# Altium PCB PCB_Sword.PcbDoc
Units mm, origin at the board's own origin, x right, y up, seen from the top; angles counter-clockwise.
Board outline 100 x 19 mm, 4 copper layers (Top Layer, Int1 (GND), Int2 (PWR), Bottom Layer), stack 1.333 mm thick; 110 components, 77 nets, 444 pads, 119 vias.
Unrouted connection lines stored in the file: 3.
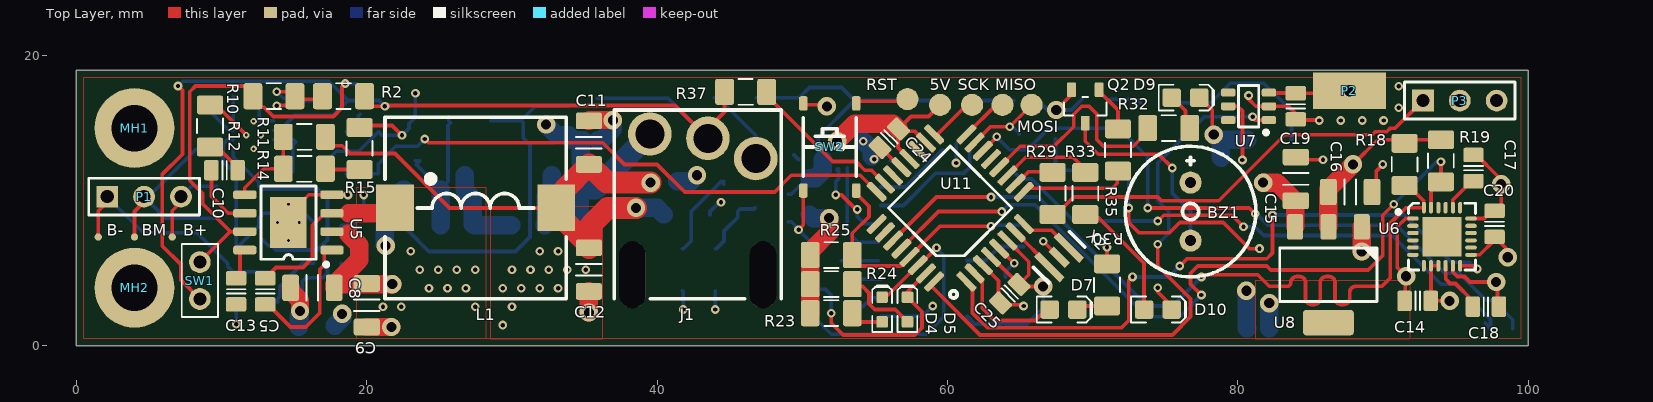
[diagram p0: Top Layer view]
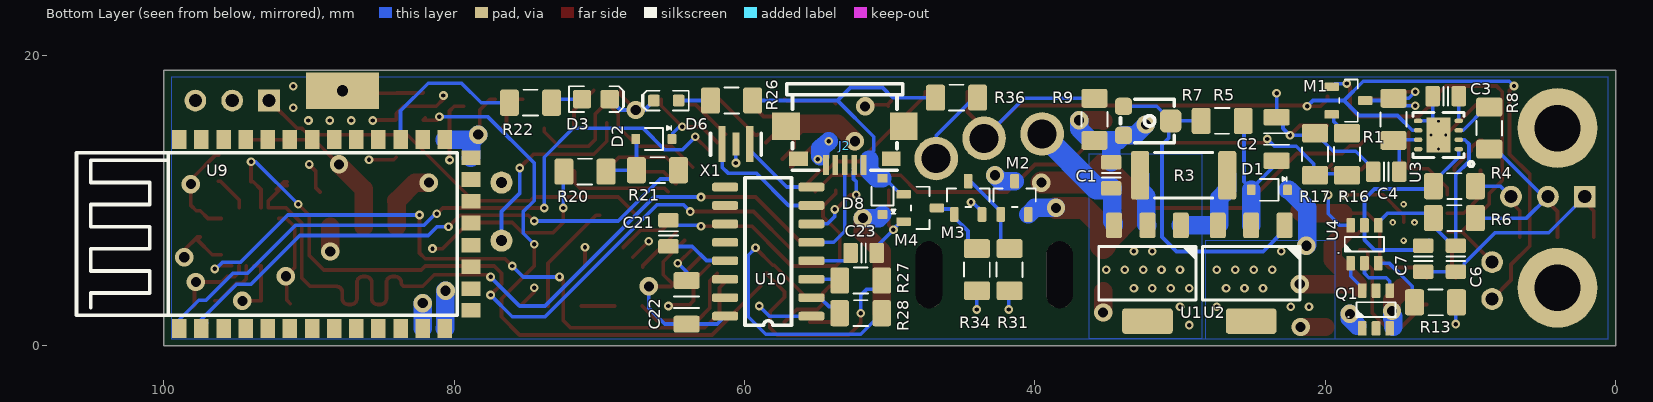
[diagram p1: Bottom Layer view, seen from below]
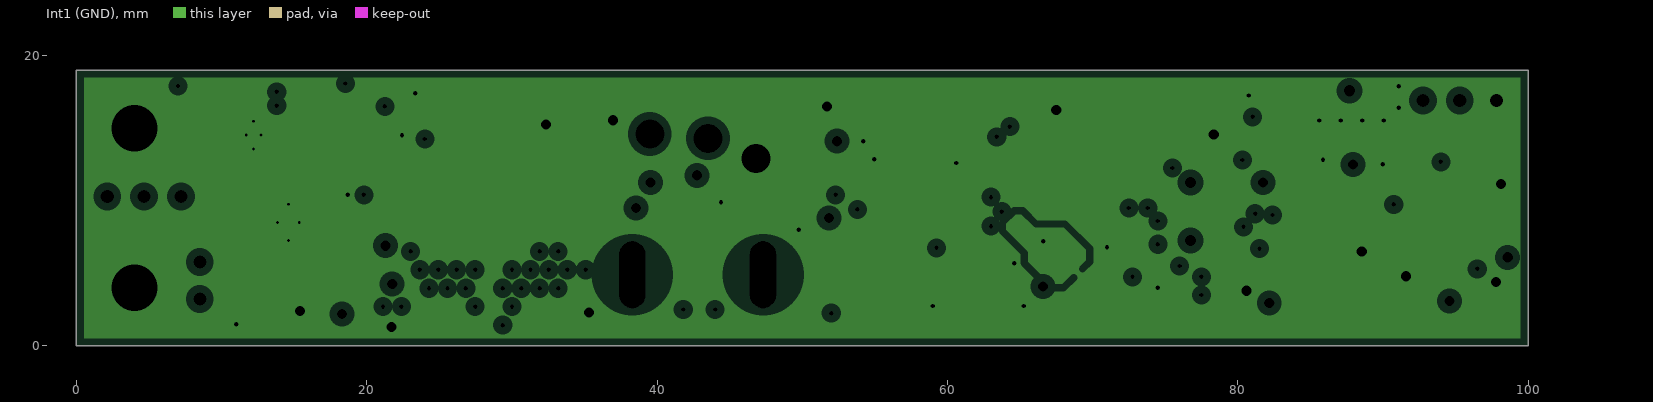
[diagram p2: Int1 (GND), clearances drawn from the general rule]
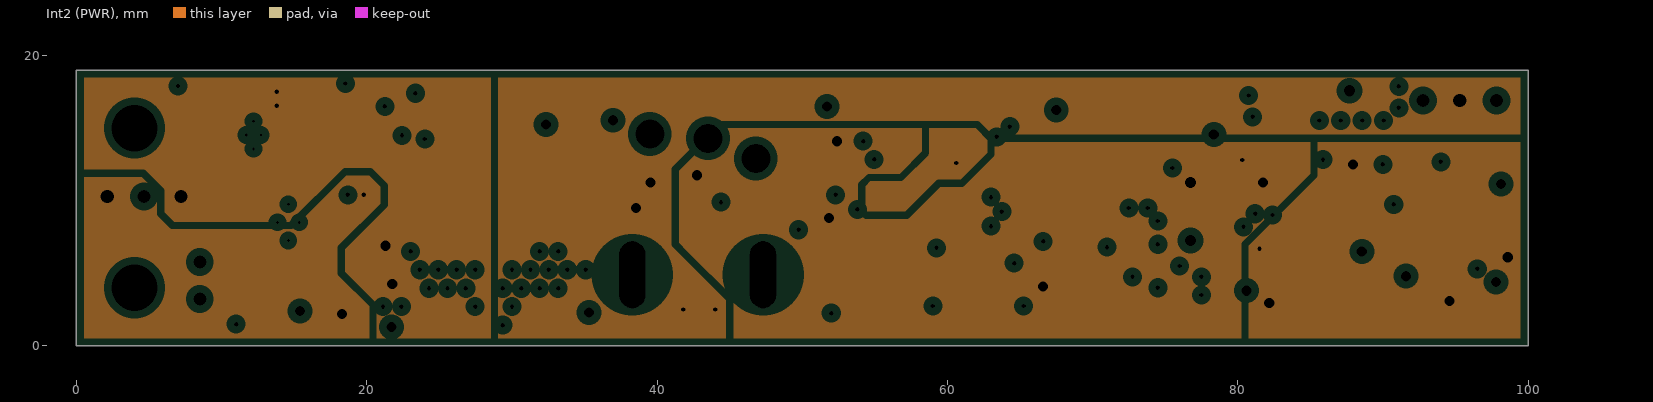
[diagram p3: Int2 (PWR), clearances drawn from the general rule]

## Layer stack, top to bottom
Top Solder: solder mask 0.0254, SM-001, Dk 4
Top Layer: signal copper 0.035
Dielectric 1: prepreg 0.1295, PP-017, Dk 4.3
Dielectric 2: prepreg 0.1295, PP-017, Dk 4.3
Int1 (GND): plane copper 0.017, net GND
Dielectric 3: core 0.7112, Core-039, Dk 4.8
Int2 (PWR): plane copper 0.017, net (Multiple Nets)
Dielectric 4: prepreg 0.1295, PP-017, Dk 4.3
Dielectric 5: prepreg 0.1295, PP-017, Dk 4.3
Bottom Layer: signal copper 0.035
Bottom Solder: solder mask 0.0254, SM-001, Dk 4

## Board outline
0,0 100,0 100,19 0,19

## Design rules (kind name [scope] priority, off if disabled: settings)
Clearance [All] p1: gap=0.3 ignorepadtopadclearanceinfootprint=FALSE except(0: Arc-Hole Track-Hole Text-Hole; 0.127: Arc-Arc Arc-Track Track-Track SMDPad-SMDPad; 0.15: Arc-Text Track-Text SMDPad-Text THPad-Text Via-Text Fill-Text Poly-Text Region-Text Text-Text; 0.2: Arc-SMDPad Track-SMDPad; 0.254: Arc-Via Track-Via SMDPad-Via; 0.33: Arc-THPad Track-THPad SMDPad-THPad; 0.5: SMDPad-Hole THPad-THPad THPad-Via THPad-Hole Via-Via Via-Hole Fill-Hole Poly-Hole Region-Hole)
MatchedLengths [InNetClass('I2C')] p1: tolerance=1 checknetsindiffpair=FALSE checkdiffpairvsdiffpair=TRUE checkxsignals=TRUE checkothers=TRUE
PlaneClearance [All] p1: clearance=0.508
PlaneConnect [All] p1: planeconnectstyle=Direct reliefexpansion=0.508 reliefentries=4 reliefconductorwidth=0.254 reliefairgap=0.254
PolygonConnect PolygonConnect_3 [(ObjectKind = 'Poly') And (Net = '3.3V')] p1: connectstyle=Direct reliefconductorwidth=0.254 reliefentries=4 polygonreliefangle="90 Angle" airgapwidth=0.254
PolygonConnect PolygonConnect_2 [(ObjectKind = 'Poly') And (Name = 'Bottom Layer-2')] p2: connectstyle=Direct reliefconductorwidth=0.254 reliefentries=4 polygonreliefangle="90 Angle" airgapwidth=0.254
PolygonConnect PolygonConnect_1 [(ObjectKind = 'Poly') And (Name = 'Bottom Layer-1')] p3: connectstyle=Direct reliefconductorwidth=0.254 reliefentries=4 polygonreliefangle="90 Angle" airgapwidth=0.254
PolygonConnect [All] p4: thpad.connectstyle=Relief thpad.reliefconductorwidth=0.254 thpad.reliefentries=4 thpad.polygonreliefangle="90 Angle" thpad.airgapwidth=0.254 smdpad.connectstyle=Relief smdpad.reliefconductorwidth=0.254 smdpad.reliefentries=4 smdpad.polygonreliefangle="90 Angle" smdpad.airgapwidth=0.254 via.connectstyle=Direct via.reliefconductorwidth=0.254 via.reliefentries=4 via.polygonreliefangle="90 Angle" via.airgapwidth=0.254
RoutingVias ViaMin [All] p1: holewidth=0.3 width=0.6 viastyle="Through Hole" minholewidth=0.3 minwidth=0.6 maxholewidth=0.7 maxwidth=1.27
RoutingVias [All] p2: holewidth=0.711 width=1.27 viastyle="Through Hole" minholewidth=0.711 minwidth=1.27 maxholewidth=0.711 maxwidth=1.27
RoutingVias PadVia [All] p3: holewidth=0.2 width=0.45 viastyle="Through Hole" minholewidth=0.2 minwidth=0.45 maxholewidth=0.711 maxwidth=1.27
SolderMaskExpansion [All] p1: expansion=0.102
Width WidthPower [All] p1: maxlimit=1.524 minlimit=0.254 preferedwidth=1.27
Width [All] p2: maxlimit=1.524 minlimit=0.254 preferedwidth=0.254
28 further rules are at their usual default settings.

## Classes and differential pairs
net class I2C: SCL SDA

## Components (designator, comment, footprint, x,y, rotation, side; value= is the part's Value field where it differs from the comment)
5V "5V" TP_15 59.5,16.6 r90 top (schematic designator TC2)
B+ "TESTPOINT" TP-R20 6.6,7.5 r90 top (schematic designator TP_B+1)
B- "TESTPOINT" TP-R20 1.5,7.5 r90 top (schematic designator TP_B-1)
BM "TESTPOINT" TP-R20 4,7.5 r90 top (schematic designator TP_BM1)
BZ1 "Buzzer" BUZZER 76.75,9.25 r270 top locked
C1 "10uF" CAP_0805 34.75,11.75 r90 bottom
C2 "10uF" CAP_1206 23.35,14.25 r90 bottom
C3 "0.33uF" CAP_0805 11.7,17.2 r0 bottom
C4 "0.1uF" CAP_0805 15.8,12 r0 bottom
C5 "100nF" CAP_0805 13,3.75 r90 top
C6 "100nF" CAP_0805 11,6 r270 bottom
C7 "68nF" CAP_0805 13.25,6 r270 bottom
C8 "10uF" CAP_1206 16.25,4 r180 top
C9 "10uF" CAP_1206 20,2.8 r270 top
C10 "4.7nF" CAP_0805 10.2,12.1 r0 top
C11 "22uF" CAP_1206 35.3,14 r90 top
C12 "22uF" CAP_1206 35.3,5.25 r270 top
C13 "0.1uF" CAP_0805 11,3.75 r270 top
C14 "10nF" CAP_0805 92.4,3.1 r0 top
C15 "10uF" CAP_1206 84,11.5 r90 top
C16 "22uF" CAP_1206 87.75,10.6 r0 top
C17 "2.2nF" CAP_0805 96.25,12.25 r90 top
C18 "0.1uF" CAP_0805 97.1,2.7 r180 top
C19 "50pF" CAP_0805 84,16.5 r270 top
C20 "0.1uF" CAP_0805 97.7,8.4 r270 top
C21 "0.1uF" CAP_0805 65.25,7.75 r90 bottom
C22 "10uF" CAP_1206 64,3 r90 bottom
C23 "10nF" CAP_0805 51.8,6.4 r180 bottom
C24 "0.1uF" CAP_0805 56,14.3 r45 top
C25 "0.1uF" CAP_0805 64.3,3.6 r45 top
D1 "BAT60" SOD323 23.85,10.75 r0 bottom
D2 "BAT60" SOD323 66.25,14.25 r0 bottom
D3 "LED_B" LED_0805 70.25,17 r180 bottom
D4 "LED_Y" LED-0603-YELLOW 55.5,2.5 r90 top
D5 "LED_Y" LED-0603-YELLOW 57.25,2.5 r90 top
D6 "LED_Y" LED-0603-YELLOW 65.4,16.9 r0 bottom
D7 "LED_G" LED_0805 68,2.5 r0 top
D8 "BAT60" SOD323 50.5,10.3 r90 bottom
D9 "LED_W" LED_0805 76.4,17.1 r0 top
D10 "LED_R" LED_0805 74.5,2.5 r0 top
J1 "JACK_DC" DC-004 42.8,3.5 r180 top locked
J2 "USB_Micro_TypeB" USB_MICRO_TYPEB 53.1,13.8 r0 bottom
L1 "INDC_15uH" IND_15UH 27.5,9.5 r0 top locked
M1 "NMOS_FDN335N" SOT23_213 18.4,16.9 r180 bottom
M2 "FDN304P" SOT23_213 41.4,10.2 r90 bottom
M3 "FDN335N" SOT23_213 44.6,10.2 r90 bottom
M4 "FDN335N" SOT23_213 47.9,9.5 r180 bottom
MH1 "Hole_M3" HOLE_M3 4,15 r0 top
MH2 "Hole_M3" HOLE_M3 4,4 r0 top
MISO "MISO" TP_15 63.8,16.6 r90 top (schematic designator TC4)
MOSI "MOSI" TP_15 65.8,16.6 r0 top (schematic designator TC3)
P1 "Header 3" HDR1X3 2.12,10.28 r0 top
P2 "TouchPin" TOUCHPAD 87.7,17.575 r270 top
P3 "Header 3" HDR1X3 92.76,16.9 r0 top
Q1 "FS8205A" SOT23-6 16.5,2.5 r90 bottom
Q2 "S8050_J3Y" SOT23_213 69.5,16.5 r270 top
R1 "100R" RESC3216X70N 15.3,15.6 r90 bottom value=N/A
R2 "100K" RESC3216X70N 18.4,17.2 r180 top value=N/A
R3 "RES_1R_2512" RESC6332X70N 29.75,11.75 r180 bottom value=1R
R4 "160R" RESC3216X70N 11.1,11 r0 bottom value=N/A
R5 "120R" RESC3216X70N 27.1,15.5 r0 bottom value=N/A
R6 "260R" RESC3216X70N 11.1,8.8 r0 bottom value=N/A
R7 "2K2" RES_VAR 32.1,15.5 r270 bottom
R8 "100R" RESC3216X70N 8.7,15 r90 bottom value=N/A
R9 "100K" RESC3216X70N 35.9,15.6 r90 bottom value=N/A
R10 "220K" RESC3216X70N 13.6,17.2 r180 top value=N/A
R11 "62K" RESC3216X70N 15.7,14.4 r180 top value=N/A
R12 "18K" RESC3216X70N 9.2,15.15 r90 top value=N/A
R13 "2K" RESC3216X70N 12.4,3 r180 bottom value=N/A
R14 "11K" RESC3216X70N 15.7,12.2 r0 top value=N/A
R15 "820R" RESC3216X70N 19.5,13.6 r90 top value=N/A
R16 "68K" RESC3216X70N 18.5,13.2 r270 bottom value=N/A
R17 "100K" RESC3216X70N 20.7,13.2 r90 bottom value=N/A
R18 "4K7" RESC3216X70N 91.5,12.5 r270 top value=N/A
R19 "4K7" RESC3216X70N 94,12.75 r270 top value=N/A
R20 "3K3" RESC3216X70N 71,12 r180 bottom value=N/A
R21 "1K" RESC3216X70N 66,12.1 r180 bottom value=N/A
R22 "100R" RESC3216X70N 74.75,16.75 r180 bottom value=N/A
R23 "470R" RESC3216X70N 52,2.25 r180 top value=N/A
R24 "470R" RESC3216X70N 52,4.25 r0 top value=N/A
R25 "10K" RESC3216X70N 52,6.25 r0 top value=N/A
R26 "130R" RESC3216X70N 60.9,16.9 r180 bottom value=N/A
R27 "1K" RESC3216X70N 52,4.5 r180 bottom value=N/A
R28 "1K" RESC3216X70N 52,2.25 r180 bottom value=N/A
R29 "470R" RESC3216X70N 67.25,10.5 r90 top value=N/A
R30 "2K" RESC3216X70N 71,4.2 r90 top value=N/A
R31 "10K" RESC3216X70N 41.75,5.25 r90 bottom value=N/A
R32 "100R" RESC3216X70N 75.25,15 r180 top value=N/A
R33 "150R" RESC3216X70N 69.5,10.5 r270 top value=N/A
R34 "10K" RESC3216X70N 44,5.25 r90 bottom value=N/A
R35 "16K" RESC3216X70N 71.75,13.5 r90 top value=N/A
R36 "10K" RESC3216X70N 45.4,17.1 r180 bottom value=N/A
R37 "300K" RESC3216X70N 46.1,17.5 r0 top value=N/A
RST "RST" TP_15 57.25,17 r90 top (schematic designator TC1)
SCK "SCK" TP_15 61.7,16.6 r90 top (schematic designator TC5)
SW1 "SW_THD_SPDT" 3P_HEADER 8.5,4.5 r0 top
SW2 "SW_Button" BUTTON_4X4X1.5 51.9,13.7 r270 top
U1 "LM317_SOT-223" SOT223 32.25,5 r270 bottom
U2 "LM317_SOT-223" SOT223 25.1,5 r270 bottom
U3 "bq2920x" BQ2920X 12.2,14.525 r0 bottom locked
U4 "S-8252" SOT23-6 17.3,7 r90 bottom
U5 "RT7257E" RT7257E 14.6,8.505 r180 top locked
U6 "MPU-6050" MPU-6050 94.073,7.523 r0 top
U7 "TTP223" TTP223-BA6 80.75,16.5 r180 top
U8 "AMS1117-3.3V" SOT223 86.25,4.9 r270 top
U9 "HC-06_BT" HC-06_BT 89.8,7.702 r90 bottom locked
U10 "CH340G" CH340G 58.372,6.495 r0 bottom
U11 "ATMEGA328P-AU" ATMEGA328P-AU 60.2,9.5 r135 top
X1 "12MHz" XTAL_3.2x1.6 60.6,13.9 r180 bottom
X2 "16MHz" XTAL_16MHZ 67.7,6.1 r45 top

## Footprints (in the part's own frame and the unit in brackets; to place one, negate y for a bottom-side part, rotate by r counter-clockwise, add the part's x,y. Pads: shape width x height; smd on the part's side, far side on the other; paste and mask are expansions set on the pad)
3P_HEADER [mm]
  round 0.254 on Mech15: 1(0,0)
  round 1.5 hole 0.9: 2(0,1.27) 3(0,-1.27)
  silkscreen extent -1.25,-2.52 1.25,2.52
ATMEGA328P-AU [mm]
  rrect50% 1.65x0.45 smd: 1(-4.37,2.8) 2(-4.37,2) 3(-4.37,1.2) 4(-4.37,0.4) 5(-4.37,-0.4) 6(-4.37,-1.2) 7(-4.37,-2) 8(-4.37,-2.8) 17(4.37,-2.8) 18(4.37,-2) 19(4.37,-1.2) 20(4.37,-0.4) 21(4.37,0.4) 22(4.37,1.2) 23(4.37,2) 24(4.37,2.8)
  rrect50% 0.45x1.65 smd: 9(-2.8,-4.37) 10(-2,-4.37) 11(-1.2,-4.37) 12(-0.4,-4.37) 13(0.4,-4.37) 14(1.2,-4.37) 15(2,-4.37) 16(2.8,-4.37) 25(2.8,4.37) 26(2,4.37) 27(1.2,4.37) 28(0.4,4.37) 29(-0.4,4.37) 30(-1.2,4.37) 31(-2,4.37) 32(-2.8,4.37)
  silkscreen extent -4.62,-3.01 3.01,4.3, body extent -4.5,-4.5 4.5,4.5, height 1.01
BQ2920X [mm]
  oval 0.6x0.3 smd: 1(-1.4,0.975) 2(-1.4,0.325) 3(-1.4,-0.325) 4(-1.4,-0.975) 5(1.4,-0.975) 6(1.4,-0.325) 7(1.4,0.325) 8(1.4,0.975)
  rect 1.65x2.4 smd: 9(0,0)
  silkscreen extent -2.41,-1.55 1.75,2.16, body extent -1.5,-1.5 1.5,1.5, height 0.77
BUTTON_4X4X1.5 [mm]
  rrect50% 1x0.6 smd: 1(-3,1.825) 1(3,1.825) 2(-3,-1.825) 2(3,-1.825)
  silkscreen extent -2,-1.83 2,1.83, body extent -3.2,-2.55 3.2,2.55, height 1.51
BUZZER [mil]
  round 60 hole 30: 1(-78.74,0) 2(78.74,0)
  silkscreen extent -177,-177 177,177, body extent -177,-177 177,177, height 154
CAP_0805 [mm]
  round 0.254 on Mech15: 0(0,0)
  rrect25% 1x1.4 smd: 1(-0.9,0) 2(0.9,0)
  Top Layer pour cut-out: -0.675,0.7 -0.475,0.9 0.475,0.9 0.675,0.7 0.675,-0.7 0.475,-0.9 -0.475,-0.9 -0.675,-0.7
  silkscreen extent -0.15,-0.65 0.15,0.65, body extent -1.1,-0.72 1.1,0.73, height 1.34
CAP_1206 [mm]
  round 0.508 on Mech15: 0(0,0)
  rrect25% 1.15x1.8 smd: 1(-1.5,0) 2(1.5,0)
  silkscreen extent -0.4,-0.88 0.4,0.88, body extent -1.7,-0.9 1.7,0.9, height 1.8
CH340G [mm]
  rrect50% 1.8x0.6 smd: 1(-2.972,4.445) 2(-2.972,3.175) 3(-2.972,1.905) 4(-2.972,0.635) 5(-2.972,-0.635) 6(-2.972,-1.905) 7(-2.972,-3.175) 8(-2.972,-4.445) 9(2.972,-4.445) 10(2.972,-3.175) 11(2.972,-1.905) 12(2.972,-0.635) 13(2.972,0.635) 14(2.972,1.905) 15(2.972,3.175) 16(2.972,4.445)
  silkscreen extent -1.6,-5.08 1.6,5.08, body extent -4.36,-5 4.36,5, height 1.51
DC-004 [mm]
  round 3 hole 2: 1(-4,-9.4) 2(3.3,-11.1) 3(-0.7,-10.8)
  oval 1.8x4.6 hole 4.6 slot 1.8 at 0 deg unplated: MH(-4.5,-1.4) MH(4.5,-1.4)
  silkscreen extent -5.75,-12.75 5.75,0.25
HC-06_BT [mil]
  rect 51.2x39.4 smd: 1(-256,360) 2(-256,300) 3(-256,240) 4(-256,180) 5(-256,120) 6(-256,60) 7(-256,0) 8(-256,-60) 9(-256,-120) 10(-256,-180) 11(-256,-240) 12(-256,-300) 13(-256,-360) 22(256,-360) 23(256,-300) 24(256,-240) 25(256,-180) 26(256,-120) 27(256,-60) 28(256,0) 29(256,60) 30(256,120) 31(256,180) 32(256,240) 33(256,300) 34(256,360)
  rect 39.4x51.2 smd: 14(-207,-431) 15(-148,-431) 16(-89,-431) 17(-30,-431) 18(30,-431) 19(89,-431) 20(148,-431) 21(207,-431)
  silkscreen extent -220,-394 220,639, body extent -256,-429 256,634, height 170
HDR1X3 [mm] "Connector; Header; 3 Position"
  rect 1.5x1.5 hole 0.9: 1(0,0)
  round 1.5 hole 0.9: 2(2.54,0) 3(5.08,0)
  silkscreen extent -1.27,-1.27 6.35,1.27
HOLE_M3 [mm]
  round 5.5 hole 3.2: MH(0,0)
IND_15UH [mm]
  rect 2.6x3.2 smd: 1(-5.55,0) 2(5.55,0)
  silkscreen extent -6.25,-6.25 6.25,6.25, body extent -5.15,-5.1 5.15,5.1, height 3.91
LED-0603-YELLOW [mm]
  round 0.254 on Mech15: 0(0,0)
  rrect25% 0.8x0.8 smd: A(-0.85,0) K(0.85,0)
  Top Layer pour cut-out: -0.5,0.5 0.5,0.5 0.5,-0.5 -0.5,-0.5
  silkscreen extent -1.55,-0.67 1.68,0.67, body extent -0.8,-0.4 0.8,0.4, height 0.75
LED_0805 [mil]
  round 20 on Mech15: 0(0,0)
  rrect25% 50x50 smd: A(-37.5,0) K(37.5,0)
  Top Layer pour cut-out: -15,30 15,30 15,-30 -15,-30
  silkscreen extent -72,-35 77,35, body extent -39,-25 39,25, height 31
MPU-6050 [mm]
  oval 0.8x0.28 smd: 1(-2,1.25) 2(-2,0.75) 3(-2,0.25) 4(-2,-0.25) 5(-2,-0.75) 6(-2,-1.25) 13(2,-1.25) 14(2,-0.75) 15(2,-0.25) 16(2,0.25) 17(2,0.75) 18(2,1.25)
  oval 0.28x0.8 smd: 7(-1.25,-2) 8(-0.75,-2) 9(-0.25,-2) 10(0.25,-2) 11(0.75,-2) 12(1.25,-2) 19(1.25,2) 20(0.75,2) 21(0.25,2) 22(-0.25,2) 23(-0.75,2) 24(-1.25,2)
  rect 2.7x2.7 smd: 25(0,0)
  silkscreen extent -3.14,-2.3 2.3,2.3, body extent -2.04,-2.04 2.05,2.05, height 0.94
RES_VAR [mm]
  rrect50% 1.2x1.2 smd: 1(-1,-1.8) 3(1,-1.8)
  rrect50% 1.6x1.5 smd: 2(0,1.45)
  silkscreen extent -1.5,-2 1.5,1.7, body extent -1.1,-1.52 1.1,1.38, height 1.11
RESC3216X70N [mm] "Chip Resistor, Body 3.2x1.6mm, EIA 1206, IPC Medium Density"
  round 0.508 on Mech15: 0(0,0)
  rrect25% 1.3x1.8 smd: 1(-1.45,0) 2(1.45,0)
  silkscreen extent -0.51,-0.89 0.51,0.89, body extent -1.62,-0.82 1.63,0.83, height 0.69
RESC6332X70N [mm] "Chip Resistor, Body 6.3x3.2mm, 2512, IPC Medium Density"
  round 1 on Mech15: 0(0,0)
  rrect25% 1.25x3.35 smd: 1(-3,0) 2(3,0)
  silkscreen extent -2,-1.58 2,1.58, body extent -3.3,-1.7 3.3,1.7, height 0.69
RT7257E [mm]
  rrect50% 1.6x0.6 smd: 1(-3,1.905) 2(-3,0.635) 3(-3,-0.635) 4(-3,-1.905) 5(3,-1.905) 6(3,-0.635) 7(3,0.635) 8(3,1.905)
  rect 2.5x3.5 smd: 9(0,0)
  silkscreen extent -2.74,-2.5 1.9,3.04
SOD323 [mm] "SOD-323; 2 Leads; Body 1.8 x 1.35 mm, (LxW)"
  round 0.508 on Mech15: 0(0,0)
  rrect25% 0.6x0.7 smd: A(1.25,0) K(-1.25,0)
  silkscreen extent -1.2,-0.9 0.64,0.75, body extent -1.3,-0.68 1.3,0.67, height 1.1
SOT23-6 [mm]
  round 0.5 on Mech15: 0(0,0)
  rrect25% 1x0.6 smd: 1(-1.3,0.95) 2(-1.3,0) 3(-1.3,-0.95) 4(1.3,-0.95) 5(1.3,0) 6(1.3,0.95)
  silkscreen extent -0.51,-1.35 0.51,1.35, body extent -1.4,-1.45 1.4,1.45, height 1.44
SOT23_213 [mm]
  round 0.5 on Mech15: 0(0,0)
  rrect25% 1x0.6 smd: 1(-1.15,0.95) 2(-1.15,-0.95) 3(1.15,0)
  silkscreen extent -0.64,-1.46 0.64,1.46, body extent -1.4,-1.45 1.4,1.45, height 1.29
SOT223 [mm] "SOT223 /SC-73"
  round 1 on Mech15: 0(0,0)
  rrect25% 1.75x1.1 smd: 1(-3.3,2.3) 2(-3.3,0) 3(-3.3,-2.3)
  rrect25% 1.75x3.5 smd: SH(3.3,0)
  silkscreen extent -1.85,-3.35 1.85,3.35, body extent -3.65,-3.35 3.65,3.35, height 1.8
TOUCHPAD [mm]
  rect 2.5x5 hole 0.762: 1(0,0)
TP-R20 [mil]
  round 20 smd paste-30 mask+3: 1(0,0)
  body extent -11,-11 11,11
TP_15 [mil]
  round 60 smd: 1(0,0)
TTP223-BA6 [mm]
  rrect50% 1x0.55 smd: 1(-1.4,0.95) 2(-1.4,0) 3(-1.4,-0.95) 4(1.4,-0.95) 5(1.4,0) 6(1.4,0.95)
  silkscreen extent -1.34,-1.43 0.7,1.94
USB_MICRO_TYPEB [mm]
  rect 0.4x1.35 smd: 1(-1.3,1.338) 2(-0.65,1.338) 3(0,1.338) 4(0.65,1.338) 5(1.3,1.338)
  rect 1.9x1.9 smd: SH(-4.05,-1.338) SH(4.05,-1.338)
  rect 1.3x1 smd: SH(-3.2,0.913) SH(3.2,0.913)
  silkscreen extent -4,-4.25 4,1.7, body extent -4,-4 4,1.6, height 2.79
XTAL_3.2x1.6 [mm]
  rect 0.5x2.5 smd: 1(-0.95,0) 3(0.95,0)
  rect 0.5x1.6 smd: 2(0,0)
  silkscreen extent -1.75,-0.75 1.75,0.75
XTAL_16MHZ [mm]
  rect 0.5x2.5 smd: 1(-0.95,0) 3(0.95,0)
  rect 0.5x1.6 smd: 2(0,0)
  silkscreen extent -1.75,-0.75 1.75,0.75

## Part data
5V MISO MOSI RST SCK: library part TESTCONN
B+ B- BM: "SMD test pin"
BZ1: "Buzzer passive 5 VAC"
C1 C2 C8 C9 C15 C22: library part CAP_10uF, "SMD 0805/1206"
C3: library part CAP_330nF, "SMD 0805"
C4 C6 C7 C13 C18 C20 C21 C24 C25: library part CAP_0.1uF, "SMD 0805"
C5: library part CAP_100nF, "SMD 0805"
C10: library part CAP_4.7nF, "SMD 0805"
C11 C12 C16: library part CAP_22uF, "SMD 1206"
C14 C23: library part CAP_10nF, "SMD 0805"
C17: library part CAP_2.2nF, "SMD 0805"
C19: library part CAP_50pF, "SMD 0805"
D1 D2 D8: "Schottky Diode 3A, Vf~0.24V, Vr=10V"
D3 D7 D9: "SMD_0805 3V"
D4 D5 D6: "SMD_0603 2.4V"
D10: "SMD_0805 2V"
L1: "15uH ±20% 4.2A 28.4mO SMD,12.5x12.5x6.5mm Power Inductors"
M2: library part PMOS
M3 M4: library part NMOS
P1 P3: "Header, 3-Pin", LatestRevisionDate=17-Jul-2002, LatestRevisionNote="Re-released for DXP Platform.", Publisher="Altium Limited"
Q1: "NMOS, Drain-Connected, Imax 6A"
Q2: library part NPN
R1 R8 R22 R32: library part RES_100R, "Resistor SMD, 1206"
R2 R9 R17: library part RES_100K, "Resistor SMD, 1206"
R3: "Resistor SMD 1O ±5% 2W ±400ppm/? 2512", Package / Case="2512 (6332 metric)", Ratings=1W, Tolerance=±5%, Material="Thick Film", SCDType=spec
R4: library part RES_160R, "Resistor SMD, 1206"
R5: library part RES_120R, "Resistor SMD, 1206"
R6: library part RES_260R, "Resistor SMD, 1206"
R7: library part RES_Var_2K2, "Resistor SMD Variable"
R10: library part RES_220K, "Resistor SMD, 1206"
R11: library part RES_62K, "Resistor SMD, 1206"
R12: library part RES_18K, "Resistor SMD, 1206"
R13 R30: library part RES_2K, "Resistor SMD, 1206"
R14: library part RES_11K, "Resistor SMD, 1206"
R15: library part RES_820R, "Resistor SMD, 1206"
R16: library part RES_68K, "Resistor SMD, 1206"
R18 R19: library part RES_4K7, "Resistor SMD, 1206"
R20: library part RES_3K3, "Resistor SMD, 1206"
R21 R27 R28: library part RES_1K, "Resistor SMD, 1206"
R23 R24 R29: library part RES_470R, "Resistor SMD, 1206"
R25 R31 R34 R36: library part RES_10K, "Resistor SMD, 1206"
R26: library part RES_130R, "Resistor SMD, 1206"
R33: library part RES_150R, "Resistor SMD, 1206"
R35: library part RES_16K, "Resistor SMD, 1206"
R37: library part RES_300K, "Resistor SMD, 1206"
SW1: "Switch 2 position"
U1 U2: "Linear Voltage Regulator"
U3: "Automatic Cell Balance 2S Li-Ion Battery"
U4: "Battery protection IC for 2S battery pack"
U5: "DC/DC Buck Converter, 3A, 4.5V-17V Vin"
X1 X2: "Crystal Oscillator"

## Via types
v1: diameter 0.6, hole 0.3, Top Layer to Bottom Layer, 84 vias
v2: diameter 1.27, hole 0.7, Top Layer to Bottom Layer, 27 vias
v3: diameter 0.45, hole 0.2, Top Layer to Bottom Layer, 8 vias

## Nets (pads, with @x,y where several pads share a name; then routed paths per layer and width w, separated by ;. In a path a pad name is that pad's centre, name@x,y a point inside that pad or via, vN(x,y) a via of type N, cw(c..) or ccw(c..) an arc to the next point about the centre after c; other vN are vias at no path point)
3.3V: C14.2 C16.1 C20.2 R18.1 R19.1 R20.1 U6.8 U6.9 U6.13 U8.2 U8.SH U9.12 | length 35.9
  Top Layer w0.254: v1(72.5,9.5) 72.5,8.5 73.2,7.8 75.3,7.8 76,8.5 79,8.5 80.8,6.7 v1(81.5,6.7) ; v2(87.945,12.5) 89.645,14.2 R19.1 ; U6.9 U6.8 93.323,3.123 C14.2 v2(94.6,3.1) ; U6.13 96.078,6.278 96.678,6.278 97.7,7.3 97.5,7.5 C20.2 98.6,6.6 v2(98.6,6.1)
  Top Layer w1.27: U8.2 C16.1 86.25,10.805 v2(87.945,12.5)
  Bottom Layer w0.254: R20.1 72.5,11.95 72.5,9.6 72.45,9.55 v1(72.5,9.5)
  Bottom Layer w1.27: v2(82.175,2.95) 82.175,1.205 U9.12
5V: 5V.1 BZ1.1 C15.1 C22.1 C24.2 C25.2 D8.K M2.3 R23.2 R24.1 R25.1 U7.5 U8.3 U10.16 U11.4 U11.6 U11.18 U11.20 | length 47.8
  Top Layer w0.254: U11.20 56.6,13.666 56.6,14.617 C24.2@56.778,14.795 ; U11.18 57.733,14.795 C24.2@56.778,14.795 ; 5V.1 58.7,15.8 57.5,15.8 C24.2 C24.2@56.778,14.795 ; U11.4 63.046,6.127 C25.2 ; U11.6 65.6,5.797 65.6,4.9 C25.2 ; v2(66.595,4.095) 65.078,4.095 C25.2 ; U7.5 80,16.5 80.325,16.175 v1(80.325,12.8)
  Top Layer w1.27: R23.2 R24.1 R25.1 50.55,6.5 51.85,7.8 v2(51.85,8.8) ; v2(52.4,14.1) 53.6,15.3 56.254,15.3 56.617,14.936 C24.2 ; v2(81.75,11.25) 82.7,11.25 83.95,10 C15.1 83.975,9.975 U8.3@83.975,8.225
  Bottom Layer w0.254: U10.16 61.894,1.5 63.75,1.5 C22.1@63.875,1.625 ; C22.1 65.5,1.5 66.595,2.595 v2(66.595,4.095)
  Bottom Layer w1.27: M2.3 42.35,11.35 v2(42.75,11.75) ; D8.K 50.75,8.8 v2(51.85,8.8)
5V_PWR: C11.1 C12.1 L1.2 M2.2 P3.2 R11.1 R31.1 R34.1 | length 40.3
  Top Layer w0.254: R11.1 17.15,14.31 17.67,13.789 18.311,13.789 18.85,13.25 21.95,13.25 25.7,9.5 L1.2
  Top Layer w1.524: v2(38.55,9.5) 36.6,9.5 35.438,8.338 35.438,6.888 C12.1 35.162,6.888 35.162,7.088 33.05,9.2 L1.2 33.588,10.038 33.588,10.739 35.3,12.451 C11.1 36.55,11.25 v2(39.55,11.25)
  Bottom Layer w0.254: R31.1 41.8,3.75 v1(41.8,2.5) ; v1(44,2.5) R34.1
  Bottom Layer w1.27: v2(38.55,9.5) 40,9.5 M2.2
5V_USB: D8.A J2.1 M4.1 R26.2 R36.1 | length 21.7
  Bottom Layer w0.254: R36.1 49.8,17.1 50.5,17.8 52.7,17.8 53.6,16.9 ; M4.1 49.25,10.45 D8.A@50.177,11.377 ; 51.482,13.055 51.1,13.437 51.1,14.4 53.6,16.9 ; R26.2 53.6,16.9
  Bottom Layer w1.27: D8.A 50.9,11.55 51.413,12.063 51.413,12.837
8.4V: C2.1 D1.A R5.1 U2.2 U2.SH | length 10.7
  Bottom Layer w0.254: C2.1 23.659,12.75 23.405,12.495 D1.A@25.1,10.8 ; D1.A D1.A@25.1,10.8 ; R5.1 R5.1@25.65,15.75 ; R5.1@25.775,15.375 25.6,15.2 25.6,11.3 D1.A@25.1,10.8
  Bottom Layer w1.27: U2.2 D1.A
  other v1: 21.115,2.7 22.385,2.7 27.465,2.7 24.29,3.97 25.56,3.97 26.83,3.97 23.655,5.24 24.925,5.24 26.195,5.24 27.465,5.24 23.02,6.51
B+: B+.1 C8.1 C9.1 D1.K M1.3 P1.3 R1.2 R2.2 R4.1 R10.1 U5.2 | length 30.6
  Top Layer w0.254: B+.1 6.6,9.31 7.54,10.25 P1.3@7.839,10.25 ; v1(13.8,16.55) 13.82,16.57 14.62,16.57 15.05,17 R2.2@16.95,17 ; v1(13.8,17.5) 14.75,17.5 R10.1 ; U5.2 17.759,7.711 18.711,7.711
  Top Layer w1.27: C8.1 C8.1@17.75,4.13 ; 18.711,7.711 19.481,6.942 19.481,5.936 17.75,4.205 C8.1@17.75,4.13 ; v2(21.75,4.25) 17.87,4.25 C8.1@17.75,4.13
  Bottom Layer w0.254: P1.3 7.92,11 R4.1 ; v1(13.8,16.55) 14.8,16.55 15.15,16.9 M1.3 ; v1(13.8,17.5) 14.25,17.05 R1.2
  Bottom Layer w1.27: v2(21.3,6.9) 21.25,6.95 21.25,9.5 22.5,10.75 D1.K
B-: B-.1 C6.2 C7.2 P1.1 Q1.1 U4.6 | length 20.9
  Top Layer w0.254: B-.1 1.5,9.29 P1.1@2.46,10.25
  Bottom Layer w0.254: P1.1 4.6,7.8 8.3,7.8 10.427,5.673 10.427,5.473 10.8,5.1 C6.2 C7.2 ; U4.6@18.25,8.1 U4.6 19,8.3 19.8,9.1 v1(19.8,10.4)
  Bottom Layer w1.27: 17.8,1.4 18.3,1.9 v2(18.3,2.2)
BAT: R16.2 R17.1 U11.24 | length 40.4
  Top Layer w0.254: v1(24,14.25) 24.25,14 36.25,14 37.75,12.5 40,12.5 41.9,10.6 48.1,10.6 49.25,11.75 53.99,11.75 U11.24
  Bottom Layer w0.254: R16.2@18.6,11.85 20.8,11.85 20.8,12.55 22,13.75 23.5,13.75 v1(24,14.25)
BAT_CH: R37.2 U11.23 | length 10.9
  Top Layer w0.254: R37.2 47.55,17.25 52.1,12.7 53.7,12.7 54.3,12.1 54.772,12.1 U11.23
BM: BM.1 P1.2 R6.1 R8.1 | length 14
  Top Layer w0.254: BM.1 4,9.25 P1.2@5,10.25
  Bottom Layer w0.254: R8.1@8.5,13.55 8.231,13.55 4.961,10.28 P1.2 6.14,8.8 R6.1
CO: Q1.4 U4.2 | length 3.3
  Bottom Layer w0.254: Q1.4 15.55,4.45 15.8,4.7 17,4.7 17.3,5 U4.2
D4: D7.A U11.2 | length 8
  Top Layer w0.254: U11.2 62.4,4.472 62.4,2.6 63.25,1.75 66.048,1.75 D7.A@67.048,2.75
D5: R35.1 U11.9 | length 7.5
  Top Layer w0.254: U11.9 65.511,10.851 71.351,10.851 71.7,11.2 71.7,12 R35.1
D6: R29.2 U11.10 | length 3.2
  Top Layer w0.254: U11.10 64.761,11.176 65.586,12 67.35,12 R29.2@67.5,11.85
D7: R33.1 U11.11 | length 6.8
  Top Layer w0.254: U11.11 65.397,13 68.65,13 69.75,11.9 R33.1@70,11.9
D8: R32.2 U11.12 | length 15.3
  Top Layer w0.254: U11.12 65.016,13.75 67.35,13.75 68.7,15.1 68.7,15.95 69.25,16.5 69.75,16.5 70.3,15.95 70.3,14.2 70.75,13.75 72.8,13.75 73.8,14.75 R32.2
D+: J2.3 U10.5 | length 6.8
  Bottom Layer w0.254: J2.3@53.1,12.262 53.1,7.9 53.865,7.135 U10.5@55.228,7.135
D-: J2.2 U10.6 | length 6
  Top Layer w0.254: v1(52.3,10.4) 52.7,10.4 53.7,9.4 v1(53.8,9.4)
  Bottom Layer w0.254: v1(52.3,10.4) 52.3,11.3 52.5,11.5 52.5,12.012 52.4,12.112 J2.2@52.5,12.212 ; v1(53.8,9.4) 53.8,8.9 54.295,8.405 U10.6@55.228,8.405
DO: Q1.6 U4.1 | length 2.2
  Bottom Layer w0.254: Q1.6 17.45,4 18.25,4.8 U4.1
DTR: C21.1 U10.13 | length 4.4
  Bottom Layer w0.254: U10.13@61.374,5.83 U10.13 61.358,5.875 62.625,5.875 63.6,6.85 C21.1
GND: C1.2 C2.2 C3.2 C4.2 C8.2 C9.2 C11.2 C12.2 C13.2 C14.1 C15.2 C16.2 C17.2 C18.1 C19.2 C20.1 C22.2 C23.2 C24.1 C25.1 D3.K D6.K D9.K D10.K J1.1 J2.5 M3.2 M4.2 MH1.MH MH2.MH P3.3 Q1.3 Q2.2 R7.3 R9.1 R12.2 R13.2 R15.2 R17.2 R30.2 R36.2 SW2.2 U3.5 U3.9 U5.4 U5.9 U6.1 U6.11 U6.18 U7.2 U8.1 U9.13 U9.21 U9.22 U10.1 U11.3 U11.5 U11.21 X1.2 X2.2 | length 123.2
  Top Layer w0.254: R12.2 9.625,16.6 v3(11.7,14.525) v3@11.688,14.525 ; v3@12.175,15.5 v3(12.2,15.475) ; U5.9 14.6,9.005 16.005,10.41 U5.4 17.61,10.4 v1(18.7,10.4) ; R15.2@19.866,15.184 21.741,15.184 v1(22.425,14.5) ; v1(49.75,8) 50.075,8.325 SW2.2@50.075,10.7 ; SW2.2@49.913,16.862 SW2.2@50.075,16.7 ; SW2.2@50.1,16.5 50.2,16.6 51.6,16.6 v2(51.7,16.5) ; v1(54.95,12.85) 55.364,13.264 C24.1 55.417,13.664 56.774,12.307 U11.21 U11.21@56.827,12.446 ; U11.3 63.522,4.481 63.522,3.105 C25.1 63.805,2.822 65.178,2.822 v1(65.25,2.75) ; U11.5 64.566,5.7 v1(64.6,5.7) ; v1(66.6,7.2) X2.2 ; v2(67.5,16.25) 68.512,17.262 Q2.2@68.512,17.688 ; R30.2 v1(71,6.8) ; v1(74.5,4) 74.5,3.702 D10.K@75.453,2.75 ; D9.K@77.202,17 77.5,17 78.25,16.25 78.25,14.654 v2(78.354,14.55) ; v1(80.75,17.25) 80.75,17 81.25,16.5 U7.2 83.5,16.5 84,16 C19.2 84.037,15.562 85.588,15.562 v1(85.625,15.525) ; C15.2 84.175,12.825 v1(85.875,12.825) ; C16.2 89.554,10.904 89.554,12.054 v1(90,12.5) ; C14.1@91.3,2.9 C14.1 91.55,3.15 91.55,4.75 v2(91.6,4.8) 91,5.4 91,8.2 91.573,8.773 U6.1 U6.1@92.1,8.746 ; U6.11 94.828,5.518 94.828,5.072 95.128,4.772 95.628,4.772 96,4.4 v2(97.8,4.4) 97.9,4.3 97.9,2.8 C18.1 ; U6.18@96.068,8.768 U6.18 96.973,8.773 97.5,9.3 C20.1 97.775,9.3 98.148,9.673 v2(98.148,11.148) 97.954,11.342 97.954,11.646 96.45,13.15 C17.2
  Top Layer w1.27: C8.2 14.75,3.795 15.4,3.145 v2(15.4,2.4) ; C9.2 v2(21.7,1.3) ; v2(35.3,2.3) C12.2 ; C11.2 35.36,15.56 36.94,15.56 v2(36.96,15.54) ; v2(88.55,6.5) U8.1
  Bottom Layer w0.254: R13.2 11,2.95 v1(11,1.5) ; C3.2 12.6,15.5 U3.5 ; C4.2 16.7,12.2 17.9,13.4 19.45,13.4 R17.2 20.8,14.75 21.05,14.5 v1(22.425,14.5) 22.907,14.982 22.907,15.307 C2.2 v1(23.35,17.4) ; R7.3@33.837,14.5 R7.3@33.85,14.5 ; M3.2 43.65,9.25 44.3,9.9 v1(44.4,9.9) ; R36.2 44.2,17.1 46.8,14.5 J1.1 ; M4.2 49.25,8.55 49.75,8.05 v1(49.75,8) 50.9,6.85 C23.2 ; U10.1 58.3,2.05 v1(59,2.75) ; v1(60.6,12.6) X1.2 ; C22.2@64,4.75 64,5.1 v1(64.6,5.7) ; D6.K 66.9,16.25 v2(67.5,16.25) 68.548,16.25 D3.K ; U9.21 U9.21@79,13.108 ; U9.22@80.361,14.5 U9.22
  Bottom Layer w1.27: Q1.3@15.3,1.3 v2@15.3,2 ; v2@15.4,1.9 v2(15.4,2.4) ; v2(32.35,15.25) 33.1,14.5 R7.3@33.837,14.5 ; R7.3 34.235,14.165 34.9,14.165 34.75,14.015 C1.2 ; R9.1 36.15,14.15 36.96,14.96 v2(36.96,15.54) ; v1(54.2,14.1) 54.8,13.6 v1@54.8,13.05 ; v2(78.354,14.55) v2@78.715,14.19 ; U9.21 78.837,12.975 78.837,14.067 v2@78.715,14.19 ; v2(80.6,3.8) 80.609,3.791 80.609,1.206 80.65,1.206 U9.13 ; U9.22 80.641,14.19 v2@78.715,14.19
  other v1: 87.1,15.525 88.575,15.525 90.05,15.525 91.1,16.4 91.1,17.875
  other v3: 14.6,7.255 13.85,8.505 15.35,8.505 14.6,9.755 12.2,13.575 12.7,14.525
INTA: U6.12 U11.1 | length 46.7
  Top Layer w0.254: U11.1 61.734,4.006 61.734,2.266 62.75,1.25 72,1.25 72.5,1.75 72.5,4.5 v1(72.75,4.75) ; v1(76,5.5) 76.5,6 82,6 82.4,6.4 v1(82.4,9.018) ; U6.12 96.277,5.523 v1(96.5,5.3)
  Bottom Layer w0.254: v1(72.75,4.75) 75.25,4.75 v1(76,5.5) ; v1(82.4,9.018) 91.482,9.018 94.75,5.75 95.987,5.75 96.437,5.3 v1(96.5,5.3)
JDC: J1.3 R2.1 R9.2 R37.1 SW1.3 U3.6 | length 75
  Top Layer w0.254: v1(7,17.9) 7.3,17.6 7.3,13.2 5.9,11.8 5.9,6.9 7.2,5.6 7.2,4.53 SW1.3 ; R2.1 19.85,16.969 20.319,16.5 v1(21.25,16.5) 21.307,16.557 41.243,16.557 J1.3 43.5,14.96 44.65,16.11 R37.1
  Bottom Layer w0.254: v1(7,17.9) 7.327,18.227 17.373,18.227 18.7,16.9 ; U3.6 13.609,14.859 14.009,14.859 15.025,15.875 17.675,15.875 18.188,16.388 18.7,16.9 ; v1(21.25,16.5) 20.85,16.9 18.7,16.9 ; R9.2 40.75,17.05 J1.3
MISO: MISO.1 U11.16 | length 3.3
  Top Layer w0.254: U11.16 61.32,14.57 63.35,16.6 MISO.1
NetBZ1_2: BZ1.2 Q2.3 | length 13.7
  Top Layer w0.254: Q2.3 69.5,14.1 70.4,13.2 74.55,13.2 v1(75.5,12.25) ; BZ1.2@76.634,7.25 BZ1.2
  Bottom Layer w0.254: v1(75.5,12.25) 75.5,10.5 76.75,9.25 BZ1.2
NetC1_1: C1.1 J1.2 U1.3 | length 9
  Bottom Layer w0.254: U1.3@34.75,8.35 U1.3@34.8,8.3
  Bottom Layer w1.27: U1.3 34.55,8.455 34.685,8.59 34.685,10.785 C1.1
  Bottom Layer w1.524: C1.1 35.75,10.85 J1.2
NetC3_1: C3.1 U3.4 | length 1.7
  Bottom Layer w0.254: U3.4 C3.1
NetC4_1: C4.1 R1.1 U3.7 | length 3.7
  Bottom Layer w0.254: U3.7 14.95,14.2 15.1,14.05 14.9,13.85 C4.1
NetC5_1: C5.1 U5.1 | length 9.7
  Top Layer w0.254: C5.1 13.2,2.85 14.75,1.3 15.8,1.3 16.75,2.25 16.75,5.25 17.077,5.577 17.077,6.429 17.248,6.6 U5.1
NetC5_2: C5.2 L1.1 U5.3 | length 12.3
  Top Layer w0.254: C5.2 13.75,5.4 15.6,5.4 16.25,6.05 16.25,8.29 17.1,9.14 U5.3 18.75,9.14 ; L1.1@21.75,9.3 L1.1
  Top Layer w1.27: 18.75,9.14 21.59,9.14 L1.1@21.75,9.3
NetC10_1: C10.1 U5.6 | length 4.6
  Top Layer w0.254: C10.1 9.3,10.3 10.46,9.14 U5.6
NetC10_2: C10.2 R12.1 | length 3
  Top Layer w0.254: R12.1@9.2,14.15 9.431,14.15 9.951,13.63 9.951,13.449 11.1,12.3 C10.2
NetC13_1: C13.1 U5.8 | length 2.3
  Top Layer w0.254: C13.1 11.263,4.913 11.263,6.429 11.434,6.6 U5.8
NetC17_1: C17.1 U6.20 | length 2.5
  Top Layer w0.254: U6.20 94.823,10.053 96.12,11.35 C17.1
NetC18_2: C18.2 U6.10 | length 3.7
  Top Layer w0.254: U6.10@94.325,5.523 94.325,4.599 94.624,4.3 95,4.3 96.2,3.1 C18.2@96.5,3.1
NetC19_1: C19.1 P2.1 U7.3 | length 5.6
  Top Layer w0.254: U7.3 82.175,17.425 83.975,17.425 C19.1 87.525,17.4 P2.1
NetC23_1: C23.1 U10.4 | length 2.5
  Bottom Layer w0.254: C23.1@52.7,5.865 U10.4@55.228,5.865
NetD2_A: D2.A R20.2 R21.1 | length 4.3
  Bottom Layer w0.254: D2.A@67.45,14.25 R21.1 69.45,12.1 R20.2
NetD3_A: D3.A R22.2 | length 2.2
  Bottom Layer w0.254: D3.A 73.05,17 R22.2
NetD4_A: D4.A R23.1 | length 2.3
  Top Layer w0.254: R23.1@53.35,1.7 R23.1@53.4,1.65 ; R23.1@53.45,2 53.8,1.65 D4.A
NetD5_A: D5.A R24.2 | length 5.9
  Top Layer w0.254: R24.2@53.45,4 53.45,3.77 R24.2@53.78,3.77 ; R24.2 53.6,4.1 54.15,4.1 54.6,3.65 54.6,2.9 55,2.5 56.4,2.5 D5.A
NetD6_A: D6.A R26.1 | length 2.2
  Bottom Layer w0.254: R26.1 D6.A
NetD7_K: D7.K R30.1 | length 2.3
  Top Layer w0.254: D7.K@68.953,2.75 R30.1@71.25,2.75
NetD9_A: D9.A R32.1 | length 2.8
  Top Layer w0.254: D9.A@75.297,17 75.6,17 76.4,16.2 76.4,15.3 R32.1
NetD10_A: D10.A R33.2 | length 7.9
  Top Layer w0.254: R33.2@70,9 70.231,9 73.548,5.683 D10.A@73.548,2.75
NetM1_1: M1.1 R10.2 SW1.2 U5.7 | length 29.7
  Top Layer w0.254: SW1.2 10.6,7.87 ; U5.7 10.6,7.87 ; v1(18.525,18.075) 18.3,17.85 18.3,16.4 17.7,15.8 13.55,15.8 12.901,16.449 12.67,16.449 12.15,16.969 R10.2 12.15,17.45 11.7,17.9 8.2,17.9 7.8,17.5 7.8,11.4 8.7,10.5 8.7,9.77 10.6,7.87
  Bottom Layer w0.254: v1(18.525,18.075) 18.55,18.05 19.35,18.05 M1.1
NetM1_2: M1.2 R16.1 | length 1.7
  Bottom Layer w0.254: R16.1@18.6,14.75 18.711,14.75 19.404,15.443 19.404,15.804 M1.2
NetM2_1: M2.1 M3.3 R31.2 | length 6.2
  Bottom Layer w0.254: R31.2 41.83,6.7 42.35,7.22 M2.1 42.35,9.25 44.425,11.325 44.6,11.15 M3.3
NetM3_1: M3.1 M4.3 R34.2 | length 4.5
  Bottom Layer w0.254: R34.2 44.09,6.7 44.611,7.22 44.611,7.911 45.55,8.85 M3.1 45.55,9.25 45.723,9.423 46.673,9.423 M4.3
NetP3_1: P3.1 R29.1 | length 28.7
  Top Layer w0.254: R29.1@67.5,9.05 68.7,10.25 74.5,10.25 74.75,10 78.7,10 83.25,14.55 89.275,14.55 89.475,14.75 90.275,14.75 90.525,15 90.86,15 P3.1
NetQ2_1: Q2.1 R35.2 | length 3.2
  Top Layer w0.254: Q2.1@70.4,17.6 71.75,16.25 R35.2
NetR3_1: R3.1 U1.2 U1.SH | length 3.7
  Bottom Layer w1.27: U1.2 32.335,8.385 32.335,10.305 32.75,10.72 R3.1
  other v1: 29.37,1.43 30.005,2.7 29.37,3.97 30.64,3.97 31.91,3.97 33.18,3.97 30.005,5.24 31.275,5.24 32.545,5.24 33.815,5.24 35.085,5.24 31.91,6.51 33.18,6.51
NetR3_2: R3.2 U1.1 U2.3 | length 6.3
  Bottom Layer w1.27: R3.2 26.75,10.72 27.315,10.155 27.315,8.385 U2.3 U1.1
NetR5_2: R5.2 R7.1 R7.2 U2.1 | length 23.8
  Bottom Layer w0.254: U2.1 22.8,7.975 24.275,6.5 30.25,6.5 31.25,7.5 31.25,13.85 30.781,14.319 30.781,15.369 R7.2 ; R5.2 R7.2 ; R7.1 31.6,16.5 30.65,15.55 R7.2
NetR11_2: R11.2 R14.1 U5.5 | length 6.9
  Top Layer w0.254: U5.5 11.6,10.9 12.9,12.2 R14.1 ; R11.2@14.25,14.7 R11.2 R14.1 ; R14.1@14.775,12.725 R14.1
NetR14_2: R14.2 R15.1 | length 2.8
  Top Layer w0.254: R14.2@17.15,12.5 17.5,12.15 R15.1 ; R15.1@19.55,12.5 R15.1@19.75,12.3
NetR21_2: R21.2 U9.2 | length 38.7
  Top Layer w0.254: v1(74.5,8.6) 74.9,9 79.6,9 v1(80.4,8.2)
  Bottom Layer w0.254: R21.2 64.55,12.01 65.07,11.49 65.81,11.49 68.7,8.6 v1(74.5,8.6) ; v1(80.4,8.2) 81.2,8.2 81.8,7.6 90.65,7.6 94,4.25 95,4.25 97.42,1.83 U9.2 U9.2@97.047,1.573
NetR22_1: R22.1 U9.24 | length 10.8
  Bottom Layer w0.254: R22.1 78.15,16.75 79.5,18.1 81.8,18.1 83.704,16.196 U9.24
RST: C21.2 R25.2 RST.1 SW2.1 U11.29 | length 22.6
  Top Layer w0.254: SW2.1@53.725,10.7 53.725,10.5 54.6,9.625 54.6,8.9 53.45,7.75 53.45,6 53.45,5.77 53.72,5.5 56.766,5.5 U11.29 59.516,8.25 v1(63,8.25) ; SW2.1@53.725,16.7 53.875,16.85 57.1,16.85 RST.1
  Bottom Layer w0.254: v1(63,8.25) 63.066,8.316 64.916,8.316 C21.2
RXB: D2.K MOSI.1 U11.15 | length 6.3
  Top Layer w0.254: U11.15 62.972,15.1 v1(64.3,15.1) 65.75,16.55 MOSI.1@65.75,17
  Bottom Layer w0.254: v1(64.3,15.1) 64.5,15.1 64.95,14.65 D2.K@64.95,14.6
RXD: D4.K R28.2 U11.30 | length 20.7
  Top Layer w0.254: D4.K 55.75,3.35 57.958,5.558 U11.30 58.061,5.561 v1(59.25,6.75)
  Bottom Layer w0.254: R28.2@50.55,2.5 R28.2 52,0.8 58.55,0.8 59.75,2 59.75,6.25 v1(59.25,6.75)
RXU: R27.1 U10.3 | length 2.4
  Bottom Layer w0.254: R27.1@53.15,4.2 53.54,4.59 U10.3
SCK: SCK.1 U11.17 | length 3.7
  Top Layer w0.254: U11.17 59.136,14.524 59.274,14.524 SCK.1@61.75,17
SCL: R19.2 U6.23 U11.28 | length 53.4
  Top Layer w0.254: U11.28 59.384,9.25 v1(63.75,9.25) ; v1(77.5,3.5) 76.75,4.25 76.75,5 77.25,5.5 82,5.5 82.275,5.225 89,5.225 90,6.225 90,9 v1(90.75,9.75) ; U6.23 93.323,10.78 93.843,11.3 R19.2 v1(94,12.675)
  Bottom Layer w0.254: v1(63.75,9.25) 64.232,9.732 66.018,9.732 73.75,2 76,2 v1(77.5,3.5) ; v1(90.75,9.75) 93.675,12.675 v1(94,12.675)
SDA: R18.2 U6.24 U11.27 | length 55.8
  Top Layer w0.254: U11.27 59.253,10.25 v1(63,10.25) ; v1(77.5,4.75) 77.65,4.9 81.375,4.9 82.175,4.1 83.15,4.1 83.391,4.1 ccw(c83.391,4.367) 83.658,4.367 cw(c84.064,4.367) 84.064,4.773 84.268,4.773 cw(c84.268,4.367) 84.674,4.367 84.674,4.1 84.674,3.258 ccw(c85.08,3.258) 85.08,2.852 85.284,2.852 ccw(c85.284,3.258) 85.69,3.258 85.69,4.1 85.69,4.367 cw(c86.096,4.367) 86.096,4.773 86.3,4.773 cw(c86.3,4.367) 86.706,4.367 86.706,4.1 86.706,3.258 ccw(c87.112,3.258) 87.112,2.852 87.316,2.852 ccw(c87.316,3.258) 87.722,3.258 87.722,3.694 cw(c88.128,3.694) 88.128,4.1 89.675,4.1 89.95,4.1 90.5,4.65 90.5,8.425 91.598,9.523 U6.24 92.823,9.977 91.75,11.05 R18.2 ; R18.2@91.5,11.3 91.731,11.3 R18.2@92.251,10.78
  Bottom Layer w0.254: v1(63,10.25) 66.25,10.25 73.75,2.75 75.5,2.75 v1(77.5,4.75)
TC: U7.1 U11.32 | length 41.6
  Top Layer w0.254: U11.32 58.899,4.239 58.899,4.101 62.25,0.75 75.5,0.75 76.75,2 76.75,3.25 74.5,5.5 v1(74.5,7) ; v1(81.025,15.775) 81.025,15.699 81.174,15.55 U7.1 U7.1@82.008,15.692
  Bottom Layer w0.254: v1(74.5,7) 75.25,7.75 75.25,9.25 74.5,10 74.5,12.6 77.675,15.775 v1(81.025,15.775)
TXB: U9.1 U11.14 | length 46
  Top Layer w0.254: U11.14 v1(63.4,14.397) ; v1(73.8,9.5) 80.8,9.5 v1(81.2,9.1)
  Bottom Layer w0.254: v1(63.4,14.397) 64.297,13.5 65.5,13.5 67,15 71.8,15 73.8,13 v1(73.8,9.5) ; v1(81.2,9.1) 81.3,9.1 82.1,8.3 90.95,8.3 94.25,5 95.25,5 97.1,3.15 97.6,3.15 98.944,1.806 U9.1
TXD: D5.K R27.2 U11.31 | length 15.5
  Top Layer w0.254: v1(52,2.25) 52,1.569 52.819,0.75 57.75,0.75 58.25,1.25 58.25,2.35 D5.K 57.25,3.722 U11.31 U11.31@58.446,4.996
  Bottom Layer w0.254: R27.2@50.55,4 R27.2@50.55,4.09 ; R27.2 50.8,4.25 50.8,4.16 51.07,3.89 51.61,3.89 52,3.5 v1(52,2.25)
TXU: R28.1 U10.2 | length 4.4
  Bottom Layer w0.254: R28.1@52.95,2 52.95,2.17 53.062,2.282 R28.1@53.47,2.69 ; R28.1@53.15,2 53.15,2.193 53.559,2.602 53.67,2.713 54.193,2.713 54.717,3.237 54.8,3.32 55.228,3.32 U10.2 ; U10.2@54.628,3.325 54.8,3.325 U10.2@55.228,3.325
VC1: C6.1 R6.2 U3.2 U4.4 | length 15.4
  Bottom Layer w0.254: U3.2 10.791,14.191 10.391,14.191 10.1,13.9 10.1,12.7 11,11.8 C6.1 11.2,6.9 12.55,8.25 R6.2 12.875,9.125 15.725,9.125 16.35,8.5 U4.4 U4.4@16.35,8.1
VC1_CB: R8.2 U3.3 | length 2.6
  Bottom Layer w0.254: R8.2@8.9,16.45 10.5,14.85 U3.3
VC2: C7.1 R4.2 U3.1 U4.5 | length 16.2
  Bottom Layer w0.254: U3.1 10.8,13.019 12.55,11.269 R4.2 12.75,10.8 16.6,10.8 17.3,10.1 U4.5 17.3,7.3 16.6,6.6 13.75,6.6 13.45,6.9 C7.1 13.229,6.9 C7.1@12.856,7.273
VM: R13.1 U4.3 | length 4.2
  Bottom Layer w0.254: R13.1 13.85,3.25 14,3.4 14,4.1 15.6,5.7 U4.3
XI: U10.7 X1.1 | length 8.4
  Bottom Layer w0.254: U10.7 56.97,9.67 59.2,11.9 61.15,11.9 61.55,12.3 X1.1@61.55,13.5
XO: U10.8 X1.3 | length 5.3
  Bottom Layer w0.254: U10.8 57.09,10.94 X1.3@59.65,13.5
XTAL1: U11.7 X2.1 | length 3.4
  Top Layer w0.254: U11.7 67.028,5.5 X2.1
XTAL2: U11.8 X2.3 | length 3.8
  Top Layer w0.254: U11.8 65.694,7.966 67.178,7.966 X2.3
pads on no net: C1.0 C2.0 C3.0 C4.0 C5.0 C6.0 C7.0 C8.0 C9.0 C10.0 C11.0 C12.0 C13.0 C14.0 C15.0 C16.0 C17.0 C18.0 C19.0 C20.0 C21.0 C22.0 C23.0 C24.0 C25.0 D1.0 D2.0 D3.0 D4.0 D5.0 D6.0 D7.0 D8.0 D9.0 D10.0 J1.MH J2.4 J2.SH M1.0 M2.0 M3.0 M4.0 Q1.0 Q1.2 Q1.5 Q2.0 R1.0 R2.0 R3.0 R4.0 R5.0 R6.0 R8.0 R9.0 R10.0 R11.0 R12.0 R13.0 R14.0 R15.0 R16.0 R17.0 R18.0 R19.0 R20.0 R21.0 R22.0 R23.0 R24.0 R25.0 R26.0 R27.0 R28.0 R29.0 R30.0 R31.0 R32.0 R33.0 R34.0 R35.0 R36.0 R37.0 SW1.1 U1.0 U2.0 U3.8 U4.0 U6.2 U6.3 U6.4 U6.5 U6.6 U6.7 U6.14 U6.15 U6.16 U6.17 U6.19 U6.21 U6.22 U6.25 U7.4 U7.6 U8.0 U9.3 U9.4 U9.5 U9.6 U9.7 U9.8 U9.9 U9.10 U9.11 U9.14 U9.15 U9.16 U9.17 U9.18 U9.19 U9.20 U9.23 U9.25 U9.26 U9.27 U9.28 U9.29 U9.30 U9.31 U9.32 U9.33 U9.34 U10.9 U10.10 U10.11 U10.12 U10.14 U10.15 U11.13 U11.19 U11.22 U11.25 U11.26
copper on no net: | length 0.6
  Bottom Layer w0.254: 49.437,13.15 49.75,12.837 ; 56.063,12.75 56.15,12.837

## Polygon pours and split planes (outlines as drawn)
8.4V on Bottom Layer "Bottom Layer-2" (solid, remove dead copper, shelved, pour order 31): 19.3,7.25 28.272,7.25 28.272,0.5 19.3,0.5
NetR3_1 on Bottom Layer "Bottom Layer-1" (solid, remove dead copper, shelved, pour order 8): 28.5,13.25 28.5,0.5 36.25,0.5 36.25,13.25
GND on Bottom Layer "Bottom Layer-GND" (solid, remove dead copper, shelved, pour order 37): 0.5,18.5 99.5,18.5 99.5,0.5 0.5,0.5
3.3V on Top Layer "Top Layer-3.3V" (solid, shelved, pour order 35): 81.2,4.5 81.2,0.5 91.9,0.5 91.9,4.5
NetR3_1 on Top Layer "Top Layer-1" (solid, remove dead copper, shelved, pour order 32): 28.5,9.6 28.5,0.5 36.25,0.5 36.25,9.6
8.4V on Top Layer "Top Layer-2" (solid, remove dead copper, shelved, pour order 33): 19.3,10.917 28.2,10.917 28.2,0.5 19.3,0.5
GND on Top Layer "Top Layer-GND" (solid, remove dead copper, shelved, pour order 39): 0.5,18.5 99.5,18.5 99.5,0.5 0.5,0.5
GND on Int1 (GND) (split plane): 99.49,0.51 0.51,0.51 0.51,18.49 99.49,18.49
5V_PWR on Int2 (PWR) (split plane): 99.49,14.552 63.104,14.552 62.228,15.428 62.176,15.468 62.115,15.494 62.05,15.502 44.325,15.502 44.26,15.494 44.199,15.468 44.169,15.446 44.147,15.428 41.072,12.353 41.032,12.301 41.006,12.24 40.998,12.175 40.998,10.25 40.998,7 41.006,6.935 41.032,6.874 41.072,6.822 41.822,6.072 44.748,3.146 44.748,2.25 44.748,0.51 29.052,0.51 29.052,18.49 99.49,18.49
B- on Int2 (PWR) (split plane): 20.948,10.946 20.948,9.804 18.072,6.928 18.032,6.876 18.006,6.815 17.998,6.75 17.998,5 18.006,4.935 18.032,4.874 18.072,4.822 20.175,2.719 20.175,2.577 20.174,2.574 20.173,0.51 0.51,0.51 0.51,11.648 4.496,11.648 5.548,10.596 5.548,9.1 5.556,9.035 5.582,8.974 5.622,8.922 6.422,8.122 6.444,8.104 6.474,8.082 6.535,8.056 6.6,8.048 14.8,8.048 14.865,8.056 14.926,8.082 14.978,8.122 18.604,11.748 20.146,11.748
B+ on Int2 (PWR) (split plane): 28.548,0.51 20.678,0.51 20.679,2.571 20.679,2.574 20.679,2.823 20.67,2.888 20.645,2.949 20.605,3.002 18.502,5.104 18.502,6.646 21.378,9.522 21.418,9.574 21.444,9.635 21.452,9.7 21.452,11.05 21.444,11.115 21.418,11.176 21.396,11.206 21.378,11.228 20.428,12.178 20.376,12.218 20.315,12.244 20.25,12.252 18.5,12.252 18.435,12.244 18.392,12.226 18.374,12.218 18.351,12.201 18.322,12.178 14.696,8.552 6.704,8.552 6.052,9.204 6.052,10.7 6.044,10.765 6.018,10.826 5.996,10.856 5.978,10.878 4.778,12.078 4.726,12.118 4.665,12.144 4.6,12.152 0.51,12.152 0.51,18.49 28.548,18.49
5V on Int2 (PWR) (split plane): 58.248,13.404 56.696,11.852 54.6,11.852 54.535,11.844 54.474,11.818 54.422,11.778 53.922,11.278 53.882,11.226 53.856,11.165 53.848,11.1 53.848,9.3 53.856,9.235 53.882,9.174 53.922,9.122 54.222,8.822 54.274,8.782 54.335,8.756 54.4,8.748 57.2,8.748 57.265,8.756 57.326,8.782 57.378,8.822 59.504,10.948 61,10.948 61.065,10.956 61.126,10.982 61.178,11.022 63.178,13.022 63.201,13.051 63.218,13.074 63.226,13.092 63.244,13.135 63.252,13.2 63.252,14.002 63.278,14.022 63.298,14.048 84.998,14.048 84.998,11.854 80.322,7.178 80.282,7.126 80.256,7.065 80.248,7 80.248,0.51 45.252,0.51 45.252,2.25 45.252,3.25 45.244,3.315 45.218,3.376 45.196,3.406 45.178,3.428 42.178,6.428 41.502,7.104 41.502,10.25 41.502,12.071 44.429,14.998 58.248,14.998
GND on Int2 (PWR) (split plane): 62.748,14.196 62.748,13.304 60.896,11.452 59.4,11.452 59.335,11.444 59.274,11.418 59.222,11.378 57.096,9.252 54.504,9.252 54.352,9.404 54.352,10.996 54.704,11.348 56.8,11.348 56.865,11.356 56.926,11.382 56.978,11.422 58.678,13.122 58.696,13.144 58.718,13.174 58.744,13.235 58.752,13.3 58.752,14.998 61.946,14.998
3.3V on Int2 (PWR) (split plane): 99.49,0.51 80.752,0.51 80.752,6.896 85.428,11.572 85.468,11.624 85.494,11.685 85.502,11.75 85.502,14.048 99.49,14.048

## Other copper
Int1 (GND) (plane layer: these items are gaps in the copper):
  lines w0.5: 68.7,4.7 68,4 67,4 65.3,5.7 65.3,6.4 63.8,7.9 63.8,8.5 64.6,9.3 65.2,9.3 66.1,8.4 68.1,8.4 69.8,6.7 69.8,5.8 69.3,5.3
Int2 (PWR) (plane layer: these items are gaps in the copper):
  lines w0.254: 58.792,0.108 59,0.317 ; 84.9,0 85.25,0.35
  lines w0.5: 0,11.7 0.2,11.9 4.6,11.9 5.8,10.7 5.8,9.1 6.6,8.3 14.8,8.3 18.5,12 20.25,12 21.2,11.05 21.2,9.7 18.25,6.75 18.25,5 20.427,2.823 20.427,2.574 ; 20.425,-0.225 20.426,2.574 ; 27.8,19 28.8,19 28.8,0 ; 45,0 45,2.25 45,3.25 42,6.25 41.25,7 41.25,10.25 41.25,12.175 44.325,15.25 57.45,15.25 62.05,15.25 63.1,14.2 ; 58.5,15.2 58.5,13.3 56.8,11.6 54.6,11.6 54.1,11.1 54.1,9.3 54.4,9 57.2,9 59.4,11.2 61,11.2 63,13.2 63,14.3 75.8,14.3 100,14.3 ; 82.5,0 80.5,0 80.5,7 85.25,11.75 85.25,14.25 ; 20.426,2.574 20.427,2.574

## Silkscreen, mask and mechanical layers (free items; w line width, h text height)
Mechanical 1:
  the board outline again, w0.254